# Altium PCB 100885.pcbdoc (part 3 of 3)
Units mm, origin at the board's own origin, x right, y up, seen from the top; angles counter-clockwise.
Board outline 292.21 x 226.73 mm, 2 copper layers (Top Layer, Bottom Layer), stack 0.091 mm thick; 33 components, 69 nets, 230 pads, 87 vias.
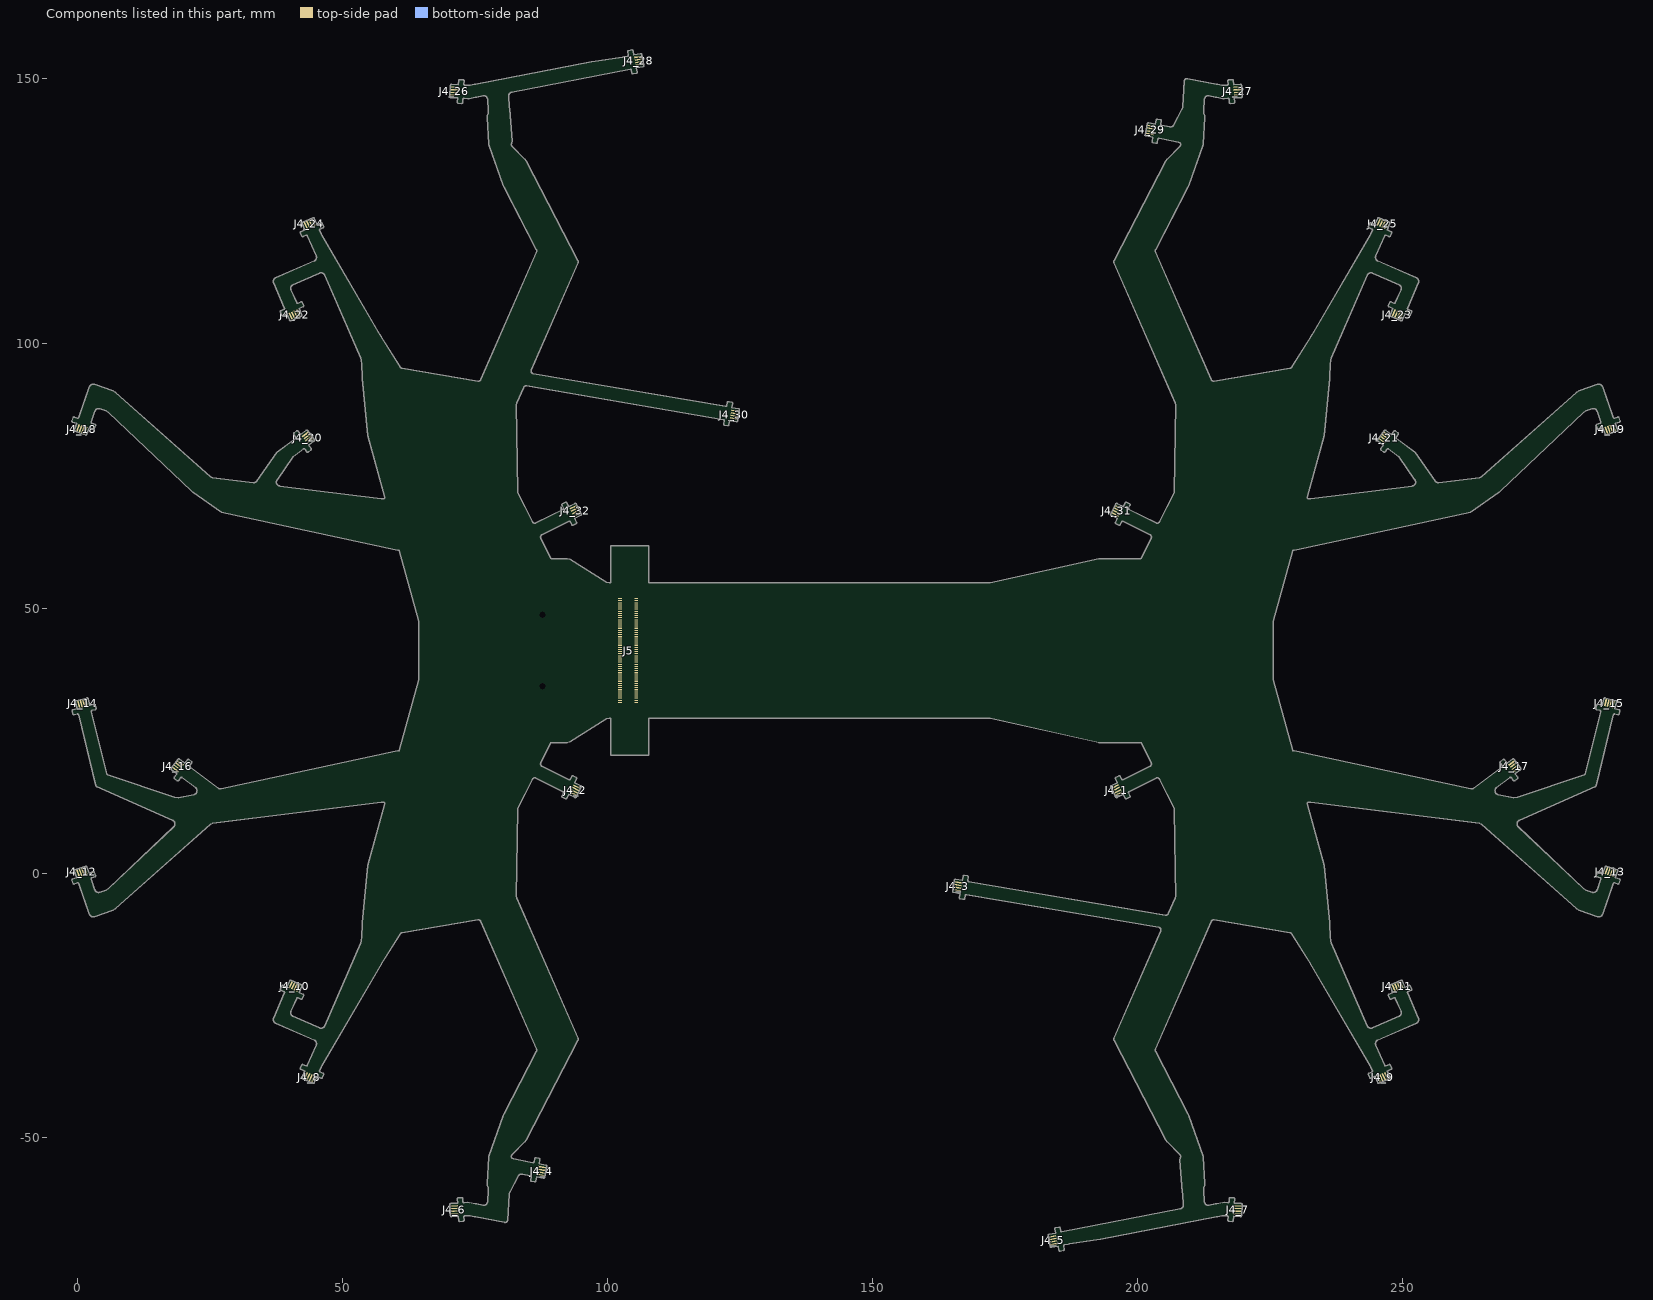
[diagram p3: the components of this part, seen from the top]

## Polygon pours and split planes (outlines as drawn) (continued)
GND on Bottom Layer "NONET_L-01_P-001" (solid, pour order 47): 70.326,-64.677 70.198,-62.581 cw(c70.398,-62.569) 70.386,-62.369 71.683,-62.29 71.634,-61.491 cw(c71.834,-61.479) 71.822,-61.279 72.421,-61.243 72.697,-65.734 72.096,-65.771 cw(c72.084,-65.571) 71.885,-65.584 71.836,-64.785 70.538,-64.864 cw(c70.526,-64.665)
GND on Bottom Layer "NONET_L-01_P-001" (solid, pour order 49): 42.25,120.257 42.007,120.805 cw(c42.19,120.885) 42.11,121.068 42.843,121.389 42.322,122.58 cw(c42.505,122.66) 42.425,122.843 44.349,123.685 cw(c44.429,123.502) 44.612,123.582 45.134,122.391 45.866,122.712 cw(c45.947,122.529) 46.13,122.609 46.37,122.059
GND on Bottom Layer "NONET_L-01_P-001" (solid, pour order 51): 38.472,105.336 ccw(c38.655,105.416) 38.735,105.233 39.468,105.554 39.989,104.363 ccw(c40.173,104.443) 40.253,104.26 42.177,105.102 ccw(c42.096,105.285) 42.28,105.365 41.758,106.556 42.491,106.877 ccw(c42.411,107.06) 42.594,107.14 42.354,107.69 38.231,105.886
GND on Bottom Layer "NONET_L-01_P-001" (solid, pour order 53): 43.498,79.478 40.801,83.077 41.279,83.438 cw(c41.399,83.278) 41.559,83.398 42.039,82.758 43.079,83.538 cw(c43.199,83.378) 43.359,83.498 44.619,81.817 cw(c44.459,81.697) 44.579,81.537 43.538,80.758 44.018,80.117 cw(c43.858,79.998) 43.978,79.837
GND on Bottom Layer "NONET_L-01_P-001" (solid, pour order 55): -0.547,83.38 cw(c-0.48,83.569) -0.669,83.635 -0.24,84.862 -0.995,85.126 cw(c-0.929,85.315) -1.118,85.381 -0.92,85.947 3.329,84.448 3.13,83.895 cw(c2.941,83.961) 2.875,83.772 2.12,84.036 1.691,82.809 cw(c1.502,82.875) 1.436,82.687
GND on Bottom Layer "NONET_L-01_P-001" (solid, pour order 57): -0.944,30.02 -1.088,30.607 cw(c-0.894,30.654) -0.941,30.849 -0.164,31.039 -0.473,32.301 cw(c-0.279,32.349) -0.326,32.543 1.714,33.042 cw(c1.761,32.848) 1.956,32.895 2.264,31.632 3.041,31.822 cw(c3.089,31.628) 3.283,31.676 3.426,31.093
GND on Bottom Layer "NONET_L-01_P-001" (solid, pour order 59): 18.258,17.822 cw(c18.378,17.983) 18.218,18.102 18.698,18.743 17.658,19.522 cw(c17.778,19.682) 17.618,19.802 18.877,21.483 cw(c19.037,21.363) 19.157,21.523 20.197,20.743 20.677,21.383 cw(c20.837,21.263) 20.957,21.423 21.437,21.063 18.732,17.463
GND on Bottom Layer "NONET_L-01_P-001" (solid, pour order 61): -0.92,-1.941 -1.118,-1.375 cw(c-0.929,-1.309) -0.995,-1.12 -0.24,-0.856 -0.669,0.371 cw(c-0.48,0.437) -0.547,0.626 1.436,1.319 cw(c1.502,1.13) 1.691,1.197 2.12,-0.031 2.875,0.234 cw(c2.941,0.045) 3.13,0.111 3.328,-0.456
GND on Bottom Layer "NONET_L-01_P-001" (solid, pour order 63): 38.233,-21.884 38.472,-21.33 cw(c38.655,-21.411) 38.735,-21.227 39.468,-21.548 39.989,-20.357 cw(c40.173,-20.437) 40.253,-20.254 42.177,-21.096 cw(c42.096,-21.279) 42.28,-21.359 41.758,-22.55 42.491,-22.871 cw(c42.411,-23.054) 42.594,-23.134 42.354,-23.684
GND on Bottom Layer "NONET_L-01_P-001" (solid, pour order 65): 42.425,-38.838 cw(c42.505,-38.654) 42.322,-38.574 42.843,-37.383 42.11,-37.062 cw(c42.19,-36.879) 42.007,-36.799 42.248,-36.249 46.372,-38.046 46.13,-38.603 cw(c45.947,-38.523) 45.866,-38.706 45.134,-38.385 44.612,-39.576 cw(c44.429,-39.496) 44.349,-39.679
no net on PSA "NONET_L-01_P-001" (solid): 64.354,45.794 64.354,38.227 91.51,24.649 91.51,59.372 64.354,45.794
no net on PSA "NONET_L-01_P-001" (solid): 24 vertices, not listed, extent 199.765,0.558 222.215,51.308

## Other copper
Top Layer:
  region net SENSOR_VCC4: 103.83,50.116 103.705,49.691 103.605,49.691 103.48,50.166 103.665,50.216
  region net SENSOR_VCC4: 103.83,48.911 103.705,48.486 103.605,48.486 103.48,48.961 103.665,49.011
  region net SENSOR_VCC4: 103.83,47.711 103.705,47.286 103.605,47.286 103.48,47.761 103.665,47.811
  region net SENSOR_VCC3: 103.83,45.311 103.705,44.886 103.65,44.875 103.48,45.361 103.665,45.411
  region net SENSOR_VCC3: 103.83,44.111 103.705,43.686 103.628,43.672 103.48,44.161 103.665,44.211
  region net SENSOR_VCC3: 103.83,42.911 103.705,42.486 103.625,42.475 103.48,42.961 103.665,43.011
  region net SENSOR_VCC2: 103.83,40.544 103.705,40.119 103.605,40.119 103.48,40.594 103.665,40.644
  region net SENSOR_VCC2: 103.83,39.325 103.705,38.9 103.625,38.9 103.48,39.375 103.665,39.425
  region net SENSOR_VCC2: 103.83,38.111 103.705,37.686 103.605,37.686 103.48,38.161 103.665,38.211
  region net SENSOR_VCC1: 103.83,35.744 103.705,35.319 103.605,35.319 103.48,35.794 103.665,35.844
  region net SENSOR_VCC1: 103.83,34.511 103.705,34.086 103.605,34.086 103.48,34.561 103.665,34.611
  region net SENSOR_VCC1: 103.83,33.325 103.705,32.9 103.605,32.9 103.48,33.375 103.665,33.425
  region net SENSOR_VCC1: 103.5,32.311 103.625,32.736 103.725,32.736 103.85,32.261 103.665,32.211
  region net SENSOR_VCC1: 103.5,33.511 103.625,33.936 103.725,33.936 103.85,33.461 103.665,33.411
  region net SENSOR_VCC1: 103.5,34.7 103.625,35.125 103.725,35.125 103.85,34.65 103.665,34.6
  region net SENSOR_VCC2: 103.5,37.111 103.625,37.536 103.725,37.536 103.85,37.061 103.665,37.011
  region net SENSOR_VCC2: 103.5,38.311 103.625,38.736 103.725,38.736 103.85,38.261 103.665,38.211
  region net SENSOR_VCC2: 103.5,39.516 103.625,39.941 103.725,39.941 103.85,39.466 103.665,39.416
  region net SENSOR_VCC3: 103.5,41.911 103.625,42.336 103.725,42.336 103.85,41.861 103.665,41.811
  region net SENSOR_VCC3: 103.5,43.111 103.625,43.536 103.725,43.536 103.85,43.061 103.665,43.011
  region net SENSOR_VCC3: 103.5,44.311 103.625,44.736 103.725,44.736 103.85,44.261 103.665,44.211
  region net SENSOR_VCC4: 103.5,46.711 103.625,47.136 103.725,47.136 103.85,46.661 103.665,46.611
  region net SENSOR_VCC4: 103.5,47.911 103.625,48.336 103.725,48.336 103.85,47.861 103.665,47.811
  region net SENSOR_VCC4: 103.5,49.111 103.625,49.536 103.725,49.536 103.85,49.061 103.665,49.011
  region net SENSOR_VCC4: 103.5,50.3 103.625,50.725 103.725,50.725 103.85,50.25 103.665,50.2
  text ".Layer_Name" at 64.059,-130.047 h3.5
Bottom Layer:
  region net SENSOR_VCC3: 103.15,45.475 103.65,45.6 103.825,45.5 103.825,45.325 103.675,45.225 103.125,45.375 103.125,45.475
  region net SENSOR_VCC2: 103.1,40.7 103.6,40.825 103.775,40.725 103.775,40.55 103.625,40.45 103.075,40.6 103.075,40.7
  region net SENSOR_VCC1: 103.125,35.9 103.625,36.025 103.8,35.925 103.8,35.75 103.65,35.65 103.1,35.8 103.1,35.9
  region net SENSOR_VCC1: 106.838,31.975 106.275,32.15 106.263,32.075 106.637,31.675 106.787,31.625 106.912,31.775 106.862,31.925
  region net SENSOR_VCC1: 106.788,33.175 106.237,33.375 106.213,33.275 106.587,32.875 106.737,32.825 106.862,32.975 106.812,33.125
  region net SENSOR_VCC1: 106.813,34.375 106.263,34.575 106.238,34.475 106.612,34.075 106.762,34.025 106.888,34.175 106.838,34.325
  region net SENSOR_VCC1: 106.863,35.6 106.313,35.8 106.288,35.7 106.662,35.3 106.812,35.25 106.938,35.4 106.888,35.55
  region net SENSOR_VCC2: 106.813,36.775 106.263,36.975 106.238,36.875 106.612,36.475 106.762,36.425 106.888,36.575 106.838,36.725
  region net SENSOR_VCC2: 106.813,37.975 106.263,38.175 106.238,38.075 106.612,37.675 106.762,37.625 106.888,37.775 106.838,37.925
  region net SENSOR_VCC2: 106.838,39.175 106.287,39.375 106.263,39.275 106.637,38.875 106.787,38.825 106.912,38.975 106.862,39.125
  region net SENSOR_VCC2: 106.863,40.4 106.313,40.6 106.288,40.5 106.662,40.1 106.812,40.05 106.938,40.2 106.888,40.35
  region net SENSOR_VCC3: 106.763,41.6 106.213,41.8 106.188,41.7 106.562,41.3 106.712,41.25 106.838,41.4 106.788,41.55
  region net SENSOR_VCC3: 106.813,42.775 106.263,42.975 106.238,42.875 106.612,42.475 106.762,42.425 106.888,42.575 106.838,42.725
  region net SENSOR_VCC3: 106.813,43.975 106.263,44.175 106.238,44.075 106.612,43.675 106.762,43.625 106.888,43.775 106.838,43.925
  region net SENSOR_VCC3: 106.788,45.175 106.237,45.375 106.213,45.275 106.587,44.875 106.737,44.825 106.862,44.975 106.812,45.125
  region net SENSOR_VCC4: 106.813,46.375 106.263,46.575 106.238,46.475 106.612,46.075 106.762,46.025 106.888,46.175 106.838,46.325
  region net SENSOR_VCC4: 106.813,47.55 106.263,47.75 106.238,47.65 106.612,47.25 106.762,47.2 106.888,47.35 106.838,47.5
  region net SENSOR_VCC4: 106.763,48.775 106.213,48.975 106.188,48.875 106.562,48.475 106.712,48.425 106.838,48.575 106.788,48.725
  region net SENSOR_VCC4: 106.725,49.95 106.175,50.15 106.15,50.05 106.525,49.65 106.675,49.6 106.8,49.75 106.75,49.9
  text "'.Board_Number'-R'.PCB_Revision'" at 146.661,52.06 h1.52
  text ".Layer_Name" at 59.568,-130.047 h3.5

## Silkscreen, mask and mechanical layers (free items; w line width, h text height)
Top Overlay:
  rectangle: 189.248,38.585 193.248,42.585
  lines w0.15: 0.622,29.708 2.172,30.076 ; 0.669,86.14 2.186,85.609 ; 0.705,-2.106 2.193,-1.585 ; 0.751,29.164 2.301,29.532 ; 0.854,86.668 2.371,86.137 ; 0.89,-2.634 2.377,-2.113 ; 3.932,16.859 5.207,18.266 ; 5.753,-3.672 6.57,-6.006 ; 5.764,87.644 6.645,90.246 ; 19.675,13.463 24.539,9.816 ; 20.172,18.216 21.114,19.473 ; 20.619,17.88 21.562,19.138 ; 22.242,72.422 24.584,74.246 ; 39.081,-23.616 40.491,-24.233 ; 39.082,107.638 40.503,108.26 ; 39.306,-23.104 40.715,-23.721 ; 39.306,107.125 40.727,107.747 ; 40.646,81.2 41.656,79.886 ; 41.082,81.535 42.092,80.221 ; 42.275,113.991 42.922,112.607 ; 42.285,-30.056 42.928,-28.543 ; 43.901,-36.202 45.295,-36.812 ; 43.946,120.221 45.347,120.844 ; 44.125,-35.69 45.519,-36.299 ; 44.165,119.728 45.566,120.35 ; 53.923,-13.632 56.713,-16.943 ; 54.047,93.466 82.46,88.688 ; 54.106,97.803 56.593,100.81 ; 54.735,-9.329 81.83,-4.721 ; 57.741,14.208 59.83,21.952 ; 57.744,69.85 59.961,61.682 ; 64.879,36.18 88.292,24.586 ; 65.146,47.838 88.529,59.518 ; 73.17,-62.733 73.264,-64.226 ; 73.2,146.656 73.286,148.315 ; 73.775,-62.695 73.87,-64.187 ; 73.783,146.626 73.869,148.284 ; 74.994,148.414 75.106,146.881 ; 75.006,-64.428 75.081,-62.859 ; 77.743,142.242 81.497,138.478 ; 77.864,-58.137 81.559,-54.319 ; 78.055,-59.781 80.859,-60.274 ; 78.098,143.772 81.035,144.341 ; 80.843,130.172 84.079,134.066 ; 80.873,-46.178 83.988,-49.856 ; 84.643,-56.498 84.945,-54.946 ; 85.192,-56.605 85.494,-55.052 ; 90.996,67.853 91.711,66.422 ; 91.006,16.182 91.716,17.609 ; 91.496,68.103 92.211,66.672 ; 91.499,15.937 92.209,17.364 ; 92.637,25.909 92.65,58.028 ; 100.056,29.948 100.056,54.041 ; 102.99,153.637 103.3,152.044 ; 103.539,153.744 103.849,152.151 ; 108.255,29.948 108.255,54.041 ; 114.488,29.948 114.488,54.041 ; 121.054,86.186 121.325,87.776 ; 121.605,86.092 121.876,87.682 ; 168.085,-3.657 168.356,-2.066 ; 168.636,-3.751 168.907,-2.16 ; 186.113,-68.137 186.418,-69.707 ; 186.662,-68.031 186.967,-69.6 ; 197.748,66.692 198.469,68.114 ; 197.769,17.309 198.433,15.981 ; 198.247,66.439 198.968,67.862 ; 198.269,17.559 198.933,16.231 ; 201.361,59.619 214.33,53.1 ; 201.704,24.574 225.106,36.357 ; 202.973,20.276 203.964,18.334 ; 204.474,139.093 204.779,140.646 ; 205.016,138.986 205.32,140.54 ; 205.76,-50.177 209.225,-45.985 ; 205.892,134.009 209.054,130.149 ; 207.572,-4.645 235.692,-9.396 ; 208.212,88.74 235.167,93.23 ; 208.357,138.332 212.134,142.152 ; 208.485,-54.327 212.135,-57.977 ; 209.052,144.345 211.989,143.739 ; 209.132,-60.272 211.93,-59.76 ; 214.87,146.885 214.934,148.442 ; 214.895,-62.894 214.969,-64.403 ; 216.094,148.234 216.175,146.716 ; 216.102,-64.11 216.191,-62.652 ; 216.66,-64.144 216.749,-62.687 ; 216.666,148.221 216.768,146.752 ; 219.4,50.55 220.925,49.775 ; 224.265,48.141 225.245,47.675 ; 229.986,61.438 232.298,70.208 ; 230.03,22.19 232.244,14.224 ; 233.118,-17.17 236.13,-13.499 ; 233.234,100.916 236.007,97.591 ; 244.373,120.35 245.836,119.71 ; 244.384,-36.291 245.917,-35.647 ; 244.598,120.863 246.06,120.223 ; 244.603,-36.811 246.136,-36.166 ; 247.012,112.513 247.695,114.069 ; 247.015,-28.515 247.69,-29.915 ; 247.848,80.184 248.851,81.549 ; 248.323,79.835 249.326,81.199 ; 249.202,107.761 250.688,107.111 ; 249.25,-23.706 250.628,-23.107 ; 249.426,108.273 250.912,107.623 ; 249.465,-24.199 250.842,-23.6 ; 265.49,9.784 270.659,13.622 ; 265.5,74.2 267.625,72.525 ; 268.405,19.13 269.344,17.89 ; 268.851,19.468 269.79,18.228 ; 283.25,90.327 284.233,87.667 ; 283.321,-6.311 284.23,-3.624 ; 284.786,18.273 285.951,16.998 ; 287.53,-2.084 288.984,-2.586 ; 287.561,86.127 289.159,86.686 ; 287.685,29.536 289.143,29.184 ; 287.705,-1.577 289.159,-2.079 ; 287.742,85.608 289.341,86.166 ; 287.814,30.069 289.272,29.718
  lines w0.254: 176,47.003 176,53 193,53 193,47 176.003,47 176,47.003
  text "#27" at 100.8,151.95 h0.8 r11
  text "#26" at 212.125,147.5 h0.8
  text "#25" at 75.575,147.35 h0.8 r12
  text "#28" at 205.5,139.3 h0.8 r349
  text "#23" at 44.675,119.475 h0.8 r294
  text "#24" at 244.45,117.625 h0.8 r66
  text "#21" at 38.525,109.875 h0.8 r293.5
  text "#22" at 250.675,108.025 h0.8 r66
  text "#18" at 287.225,88.55 h0.8 r289
  text "#29" at 118.675,87.125 h0.8 r350
  text "#17" at 2.125,86.625 h0.8 r70
  text "#20" at 248.925,80 h0.8 r323
  text "#19" at 39.425,78.825 h0.8 r37
  text "#30" at 198.825,66.625 h0.8 r333
  text "#31" at 89.575,65.825 h0.8 r26.5
  text "'.Board_Name'" at 158.755,43.922 h1.52
  text "600-'.Board_Number'" at 172.804,41.034 h1.52
  text "REV" at 183.086,38.503 h1.52
  text "#13" at 1.2,28.975 h0.8 r284
  text "#14" at 288.2,27.025 h0.8 r76
  text "#15" at 21.1,18.05 h0.8 r323
  text "#1" at 89.95,17.2 h0.8 r333
  text "#16" at 267.275,16.775 h0.8 r37
  text "#0" at 199.1,16.7 h0.8 r27
  text "#11" at 1.4,-2.85 h0.8 r289
  text "#2" at 169.125,-3.4 h0.8 r350
  text "#12" at 287.8,-4.675 h0.8 r70
  text "#10" at 249.925,-24.325 h0.8 r294
  text "#9" at 39.45,-25.65 h0.8 r66
  text "#8" at 244.025,-34.55 h0.8 r298.5
  text "#7" at 45.325,-35.825 h0.8 r66
  text "#3" at 83,-55.8 h0.8 r349
  text "#5" at 75.35,-64.1 h0.8 r350
  text "#6" at 213.225,-64.45 h0.8 r10
  text "#4" at 187.25,-69.075 h0.8 r11
  text ".Layer_Name" at 63.218,-129.964 h0.8
Bottom Overlay:
  lines w0.15: 0.629,29.715 2.179,30.083 ; 0.676,86.146 2.193,85.615 ; 0.712,-2.099 2.2,-1.579 ; 0.758,29.171 2.308,29.538 ; 0.861,86.674 2.378,86.143 ; 0.897,-2.627 2.384,-2.107 ; 3.939,16.865 5.214,18.272 ; 5.76,-3.666 6.577,-6 ; 5.771,87.65 6.652,90.252 ; 19.682,13.47 24.546,9.823 ; 20.178,18.222 21.121,19.48 ; 20.626,17.887 21.568,19.144 ; 22.249,72.428 24.591,74.252 ; 39.088,-23.61 40.498,-24.227 ; 39.089,107.644 40.51,108.266 ; 39.312,-23.097 40.722,-23.714 ; 39.313,107.132 40.734,107.754 ; 40.653,81.207 41.663,79.893 ; 41.089,81.541 42.099,80.227 ; 42.282,113.998 42.929,112.614 ; 42.292,-30.049 42.935,-28.537 ; 43.908,-36.195 45.302,-36.805 ; 43.953,120.228 45.354,120.85 ; 44.132,-35.683 45.526,-36.293 ; 44.172,119.735 45.573,120.357 ; 53.93,-13.626 56.72,-16.936 ; 54.054,93.473 82.325,88.725 ; 54.112,97.809 56.6,100.816 ; 54.742,-9.322 81.837,-4.714 ; 57.748,14.214 59.837,21.959 ; 57.751,69.857 59.968,61.688 ; 64.886,36.187 88.299,24.593 ; 65.153,47.845 88.536,59.525 ; 65.653,46.545 89.036,58.225 ; 65.761,37.412 89.175,25.75 ; 73.176,-62.727 73.271,-64.219 ; 73.207,146.663 73.293,148.321 ; 73.782,-62.688 73.877,-64.181 ; 73.79,146.632 73.876,148.291 ; 75.001,148.42 75.113,146.887 ; 75.013,-64.421 75.088,-62.852 ; 77.75,142.248 81.504,138.485 ; 77.871,-58.13 81.566,-54.313 ; 78.062,-59.775 80.865,-60.267 ; 78.105,143.779 81.042,144.348 ; 80.85,130.179 84.086,134.073 ; 80.88,-46.172 83.995,-49.85 ; 84.65,-56.492 84.952,-54.939 ; 85.199,-56.598 85.501,-55.046 ; 91.003,67.859 91.718,66.428 ; 91.013,16.189 91.723,17.616 ; 91.503,68.109 92.218,66.679 ; 91.506,15.943 92.216,17.37 ; 91.594,25.916 91.607,58.034 ; 92.644,25.916 92.657,58.034 ; 100.063,29.955 100.063,54.048 ; 102.997,153.644 103.306,152.05 ; 103.546,153.75 103.855,152.157 ; 108.262,29.955 108.262,54.048 ; 114.495,29.955 114.495,54.048 ; 121.06,86.192 121.332,87.782 ; 121.612,86.098 121.883,87.688 ; 168.092,-3.65 168.363,-2.059 ; 168.643,-3.744 168.914,-2.153 ; 186.12,-68.131 186.425,-69.7 ; 186.669,-68.024 186.974,-69.593 ; 197.755,66.699 198.476,68.121 ; 197.776,17.316 198.44,15.988 ; 198.254,66.446 198.975,67.868 ; 198.276,17.566 198.94,16.238 ; 199.675,25.375 199.675,44.1 ; 201.368,59.626 214.337,53.106 ; 201.711,24.58 225.113,36.363 ; 202.98,20.282 203.971,18.341 ; 204.481,139.099 204.786,140.652 ; 205.023,138.993 205.327,140.546 ; 205.767,-50.17 209.232,-45.978 ; 205.899,134.015 209.061,130.155 ; 206.75,51.35 214.4,51.35 ; 207.579,-4.638 235.699,-9.39 ; 207.625,0.575 215.125,0.575 ; 208.219,88.747 235.174,93.236 ; 208.364,138.339 212.141,142.159 ; 208.492,-54.321 212.142,-57.97 ; 209.059,144.352 211.996,143.745 ; 209.139,-60.265 211.937,-59.753 ; 214.876,146.891 214.941,148.448 ; 214.902,-62.887 214.976,-64.397 ; 216.101,148.24 216.182,146.722 ; 216.109,-64.103 216.198,-62.646 ; 216.667,-64.137 216.756,-62.68 ; 216.673,148.227 216.775,146.758 ; 219.407,50.557 220.932,49.782 ; 221.85,43.95 222.195,7.78 ; 224.272,48.147 225.252,47.681 ; 229.993,61.445 232.305,70.215 ; 230.037,22.197 232.251,14.231 ; 233.125,-17.164 236.137,-13.493 ; 233.241,100.923 236.014,97.598 ; 244.38,120.357 245.843,119.717 ; 244.391,-36.284 245.924,-35.64 ; 244.604,120.869 246.067,120.229 ; 244.609,-36.804 246.143,-36.16 ; 247.019,112.52 247.702,114.075 ; 247.022,-28.509 247.697,-29.909 ; 247.855,80.191 248.858,81.555 ; 248.33,79.841 249.333,81.206 ; 249.209,107.767 250.695,107.117 ; 249.257,-23.699 250.635,-23.1 ; 249.433,108.28 250.919,107.629 ; 249.472,-24.193 250.849,-23.594 ; 265.497,9.791 270.666,13.629 ; 265.507,74.207 267.632,72.532 ; 268.412,19.137 269.351,17.897 ; 268.858,19.475 269.797,18.234 ; 283.257,90.334 284.24,87.673 ; 283.328,-6.304 284.237,-3.617 ; 284.793,18.28 285.958,17.005 ; 287.537,-2.077 288.991,-2.58 ; 287.568,86.133 289.125,86.65 ; 287.692,29.542 289.15,29.191 ; 287.712,-1.57 289.166,-2.073 ; 287.749,85.614 289.3,86.15 ; 287.821,30.076 289.279,29.724
  text ".Layer_Name" at 58.293,-129.889 h3.5
Top Paste:
  text ".Layer_Name" at 63.343,-130.664 h3.5
Bottom Paste:
  text ".Layer_Name" at 59.418,-130.63 h3.5
Top Solder:
  text ".Layer_Name" at 63.234,-130.047 h3.5
Bottom Solder:
  text ".Layer_Name" at 59.793,-130.164 h3.5
Drill Guide:
  text ".Layer_Name" at 85.693,-85.214 h3.81
Outline:
  drawing of 1049 lines, arcs and shapes, not listed
FAB_DWG:
  drawing of 3124 lines, arcs and shapes, not listed
  text "1" at 427.318,319.571 h7.62
  text "6" at -124.014,319.393 h7.62
  text "5" at -13.422,319.317 h7.62
  text "7" at -233.945,319.266 h7.62
  text "4" at 96.179,319.165 h7.62
  text "3" at 206.948,319.165 h7.62
  text "2" at 316.981,319.165 h7.62
  text "REVISIONS" at 381.338,310.583 h2.54
  text "REV" at 299.046,303.583 h2.03
  text "DESCRIPTION" at 353.55,303.583 h2.03
  text "DATE" at 445.234,303.583 h2.03
  text "APRVD" at 470.422,303.583 h2.03
  text "1. MATERIAL: POLYIMIDE WITH ROLLED ANNEALED COPPER, 1/2 OZ.," at -268.773,297.272 h2.54
  text "01" at 299.45,295.583 h2.54
  text "INITIAL RELEASE" at 310.482,295.583 h2.54
  text "08/08/2016" at 439.322,295.583 h2.54
  text "PER IPC-4101, UNLESS OTHERWISE SPECIFIED ON STACK UP DETAIL." at -261.773,293.272 h2.54
  text "02" at 299.608,288.674 h2.54
  text "09/09/2016" at 439.48,288.674 h2.54
  text "OUTLINE CHANGE" at 310.668,288.607 h2.54
  text "COPPER GRAIN DIRECTION SHOULD BE ORIENTED VERTICALLY." at -263.922,286.043 h2.54
  text "2  CONFIGURATION: 2 LAYER FLEX. THROUGH PADS TO BE PLATED WITH" at -268.773,272.986 h2.54
  text "0.012mm MIN. WALL THICKNESS. SOFT IMMERSION GOLD PANEL PLATING" at -261.773,268.986 h2.54
  text "IN ACCORDANCE WITH ANSI/IPC-6013. ENIG:" at -261.773,264.986 h2.54
  text "Au: 0.05-0.1um MIN.; Ni:2-5um." at -168.773,264.986 h2.54
  text "3  COVERLAY BOTH SIDES (NO MASK)." at -268.773,257.986 h2.54
  text "4  WHITE SILKSCREEN." at -268.773,250.986 h2.54
  text "D" at 489.167,249.899 h7.62
  text "D" at -295.515,249.747 h7.62
  text "5  CONDUCTOR PATTERN TO BE ETCHED PER ARTWORK MASTER. FRONT TO BACK" at -268.773,243.986 h2.54
  text "REGISTRATION TO BE WITHIN +/- 0.1mm." at -261.773,239.986 h2.54
  text "6  HOLE DIMENSIONS ARE AFTER PLATING, 0.15 HOLES MAY BE FILLED/PLUGGED." at -268.773,231.986 h2.54
  text "7  PLATED THRU HOLES PER IPC-6013 CLASS 2." at -268.773,223.986 h2.54
  text "8  FLEX DIMENSIONS ARE IN MM.  DRILL CHART DIMENSIONS ARE IN MM." at -270.773,215.986 h2.54
  text "9  PRODUCE THE FPC ARTWORK USING ODB++ FILES PROVIDED." at -270.773,207.986 h2.54
  text "10  BUILD AND INSPECT TO IPC-A-600 CLASS 2 AND IPC-6013 CLASS 2." at -270.773,199.986 h2.54
  text "COPPER GRAIN DIRECTION" at 107.51,192.202 h5.08
  text "11  ANY ALTERATIONS TO THE ARTWORK FILES OR MATERIALS MUST BE SUBMITTED" at -270.773,191.986 h2.54
  text "FOR SYNAPSE AND/OR CUSTOMER REVIEW AND APPROVAL." at -261.773,187.986 h2.54
  text "VERTICAL" at 130.695,180.73 h5.08
  text "12  ALL 90 DEGREE EDGES ON BOARD OUTLINE TO BE 0.2MM RADII." at -270.773,179.986 h2.54
  text "13  STACKUP WITH NO STIFFENER AND NO PSA." at -271.039,172.428 h2.54
  text "16" at 366.398,171.825 h2.54
  text "14  STACKUP SHOWING BACK STIFFENER UNDER J5." at -270.81,166.144 h2.54
  text "15  STACKUP SHOWING BACK STIFFENER UNDER FPC ENDS (32X) AND WITH COVERLAY" at -271.039,160.203 h2.54
  text "REMOVED ON THE TOP." at -263.435,154.95 h2.54
  text "16  STACKUP SHOWING 2 REGIONS WITH PSA APPLIED." at -271.063,149.08 h2.54
  text "13" at -207.752,128.996 h2.54
  text "PRIMARY SIDE" at -201.013,128.531 h2.54
  text "C" at 489.167,124.448 h7.62
  text "C" at -295.642,124.245 h7.62
  text "KAPTON COVERLAY  0.0125MM" at -170.31,113.807 h2.54
  text "ADHESIVE" at -225.238,107.252 h2.54
  text "0.015MM" at -170.379,107.067 h2.54
  text "1/2 OZ RA CU" at -233.835,102.117 h2.54
  text "LAYER 1 (SIGNAL)  0.018MM" at -170.45,101.617 h2.54
  text "0.11176 +/- 10%" at -272.958,99.122 h2.54
  text "POLYIMIDE" at -226.45,97.563 h2.54
  text "0.025MM" at -170.756,97.515 h2.54
  text "SECONDARY SIDE PSA" at 334.827,95.34 h5.08
  text "LAYER 2 (GND)  0.018MM" at -170.266,93.218 h2.54
  text "1/2 OZ RA CU" at -233.9,92.968 h2.54
  text "ADHESIVE" at -225.272,88.218 h2.54
  text "0.015MM" at -170.882,87.838 h2.54
  text "KAPTON COVERLAY  0.0125MM" at -170.266,80.968 h2.54
  text "15" at 387.814,67.114 h2.54
  text "SECONDARY SIDE" at -203.673,65.263 h2.54
  text "x 32" at 388.931,62.763 h2.54
  text "LAYER DETAIL - STANDARD STACKUP" at -250.523,53.015 h5.08
  text "SCALE:NONE" at -204.343,45.572 h2.03
  text "RECOMMENDED STACK-UP" at -209.994,40.359 h2.03
  text "STACK-UP TO BE FINALIZED BY VENDOR" at -221.362,35.206 h2.03
  text "FOR BEST BUILD VARIATIONS" at -213.829,29.709 h2.03
  text "PRIMARY SIDE" at -203.495,0.718 h2.54
  text "B" at -295.413,-1.155 h7.62
  text "B" at 489.294,-1.155 h7.62
  text "14" at -222.3,-3.818 h2.54
  text "REGION 2, STACKUP AT J5" at -215.85,-4.125 h2.54
  text "14" at 388.44,-12.719 h2.54
  text "KAPTON COVERLAY  0.0125MM" at -172.792,-14.006 h2.54
  text "ADHESIVE" at -227.719,-20.561 h2.54
  text "0.015MM" at -172.861,-20.746 h2.54
  text "1/2 OZ RA CU" at -236.316,-25.696 h2.54
  text "LAYER 1 (SIGNAL)  0.018MM" at -172.932,-26.196 h2.54
  text "POLYIMIDE" at -228.932,-30.25 h2.54
  text "0.025MM" at -173.238,-30.298 h2.54
  text "0.61176 +/- 10%" at -276.936,-31.895 h2.54
  text "LAYER 2 (GND)  0.018MM" at -172.748,-34.595 h2.54
  text "1/2 OZ RA CU" at -236.382,-34.845 h2.54
  text "ADHESIVE" at -227.754,-39.595 h2.54
  text "0.015MM" at -173.364,-39.975 h2.54
  text "KAPTON COVERLAY  0.0125MM" at -172.748,-46.845 h2.54
  text "FR4 STIFFENER   0.450MM" at -168.7,-51.875 h2.54
  text "SECONDARY SIDE" at -206.154,-62.55 h2.54
  text "SECONDARY SIDE STIFFENERS" at 327.417,-80.153 h5.08
  text "PRIMARY SIDE" at -56.684,-90.223 h2.54
  text "DIMENSIONS ARE FOR REFERENCE ONLY," at 65.412,-94.047 h2.29
  text "REGION 4, STACKUP WITH PSA" at -69.039,-95.065 h2.54
  text "16" at -75.364,-95.16 h2.54
  text "USE BOARD OUTLINE FOR DIMENSIONAL DATA." at 60.822,-98.837 h2.29
  text "PRIMARY SIDE" at -194.137,-100.117 h2.54
  text "15" at -218.538,-104.868 h2.54
  text "KAPTON COVERLAY  0.0125MM" at -25.981,-104.946 h2.54
  text "REGION 3, STACKUP AT FPC ENDS (32X)" at -211.831,-105.039 h2.54
  text "ADHESIVE" at -80.908,-111.502 h2.54
  text "0.015MM" at -26.05,-111.687 h2.54
  text "1/2 OZ RA CU" at -89.505,-116.636 h2.54
  text "LAYER 1 (SIGNAL)  0.018MM" at -162.47,-117.134 h2.54
  text "LAYER 1 (SIGNAL)  0.018MM" at -26.121,-117.136 h2.54
  text "1/2 OZ RA CU" at -225.675,-117.15 h2.54
  text "POLYIMIDE" at -218.47,-121.188 h2.54
  text "POLYIMIDE" at -82.12,-121.19 h2.54
  text "0.025MM" at -162.777,-121.236 h2.54
  text "0.025MM" at -26.427,-121.239 h2.54
  text "LAYER 2 (GND)  0.018MM" at -162.286,-125.533 h2.54
  text "LAYER 2 (GND)  0.018MM" at -25.937,-125.535 h2.54
  text "1/2 OZ RA CU" at -225.92,-125.783 h2.54
  text "1/2 OZ RA CU" at -89.571,-125.785 h2.54
  text "A" at 489.04,-126.91 h7.62
  text "A" at -295.667,-127.037 h7.62
  text "0.3 +/- 10%" at -253.218,-130.369 h2.54
  text "APPROVALS" at 281.174,-130.417 h2.03
  text "DATE" at 324.234,-130.417 h2.03
  text "ADHESIVE" at -217.292,-130.533 h2.54
  text "ADHESIVE" at -80.943,-130.535 h2.54
  text "0.015MM" at -162.902,-130.914 h2.54
  text "0.015MM" at -26.553,-130.916 h2.54
  text "UNLESS OTHERWISE" at 225.226,-132.417 h2.54
  text "KAPTON COVERLAY  0.0125MM" at -162.036,-135.133 h2.54
  text "DESIGNER" at 264.482,-136.417 h2.03
  text "SPECIFIED" at 232.338,-137.417 h2.54
  text "KAPTON COVERLAY  0.0125MM" at -25.937,-137.785 h2.54
  text "0.025MM" at -162.452,-138.989 h2.54
  text "ADHESIVE" at -217.825,-139.4 h2.54
  text "DIMENSIONS ARE" at 227.258,-142.417 h2.54
  text "PRICE" at 268.482,-142.417 h2.54
  text "09/09/2016" at 318.322,-142.417 h2.54
  text "PSA, 3M TYPE 467MP, 0.05MM" at -25.747,-142.839 h2.54
  text "1511 Sixth Ave. Suite 300, Seattle, WA 98101 206.381.0898" at 355.57,-143.417 h2.54
  text "KAPTON STIFFENER  0.200MM" at -162.071,-144.064 h2.54
  text "IN MILLIMETERS" at 227.258,-147.417 h2.54
  text "ENGINEER" at 264.482,-149.417 h2.03
  text "PRINTED CIRCUIT BOARD" at 381.978,-151.917 h3.81
  text "PROPRIETARY" at 176.718,-152.417 h3.81
  text "SECONDARY SIDE" at -195.693,-153.488 h2.54
  text "SECONDARY SIDE" at -59.343,-153.49 h2.54
  text "BRUEY/  CIUFFO" at 268.482,-155.417 h2.54
  text "TOLERANCES:" at 231.306,-157.417 h2.54
  text "AND" at 188.91,-158.417 h3.81
  text ".Board_Name" at 368.433,-159.998 h5.08
  text "MECH ENG" at 264.482,-162.417 h2.03
  text ".XX" at 229.986,-164.417 h2.29
  text "0.25" at 243.482,-164.417 h2.29
  text "CONFIDENTIAL" at 175.194,-164.917 h3.81
  text "SIZE" at 347.634,-166.417 h1.78
  text "DWG NO" at 358.482,-166.417 h1.78
  text "REV" at 466.346,-166.417 h1.78
  text "DAHLGREN/ DONAGHY" at 268.482,-168.417 h2.54
  text "THE INFORMATION CONTAINED IN" at 177.208,-169.167 h1.52
  text ".XXX" at 228.154,-171.417 h2.29
  text "0.127" at 243.482,-171.417 h2.29
  text "THIS DRAWING IS PROPRIETARY AND" at 175.384,-171.917 h1.52
  text "RESTRICTED. ANY REPRODUCTION" at 177.208,-174.667 h1.52
  text "601-" at 375.537,-176.118 h7.62
  text ".Board_Number" at 403.937,-176.218 h7.62
  text "D" at 347.434,-176.417 h7.62
  text ".PCB_Revision" at 461.878,-176.925 h7.62
  text "IN PART OR WHOLE WITHOUT THE" at 177.208,-177.417 h1.52
  text "ANGLES" at 230.49,-178.417 h2.29
  text "5" at 249.482,-178.417 h2.29
  text "EXPRESS WRITTEN PERMISSION" at 178.174,-180.167 h1.52
  text "OF THE OWNER IS PROHIBITED" at 178.174,-182.917 h1.52
  text "SCALE:NONE" at 348.362,-183.417 h1.78
  text "SHEET 1 OF 1" at 459.938,-183.417 h1.78
  text "1" at 427.522,-195.465 h7.62
  text "6" at -123.938,-195.617 h7.62
  text "5" at -13.499,-195.617 h7.62
  text "4" at 95.95,-195.896 h7.62
  text "3" at 206.77,-195.922 h7.62
  text "2" at 317.209,-195.922 h7.62
  text "7" at -234.047,-196.481 h7.62
ASY_DWG:
  circle w0.38: c253.225,-175.869 r0.829
  lines w0.3: 263.482,-185.417 263.482,-125.417 ; 263.482,-171.417 343.482,-171.417 ; 263.482,-158.417 343.482,-158.417 ; 263.482,-145.417 343.482,-145.417 484.481,-145.417 ; 263.482,-132.417 343.482,-132.417 ; 294.482,286.583 484.481,286.583 ; 294.807,293.675 294.482,293.583 484.481,293.583 ; 294.807,308.675 294.482,308.583 484.481,308.583 ; 308.482,279.583 308.482,308.583 ; 313.482,-185.417 313.482,-125.417 ; 343.482,-185.417 343.482,-125.417 ; 343.482,-179.417 484.481,-179.417 ; 343.482,-163.417 483.481,-163.417 ; 356.481,-179.417 356.481,-163.417 ; 433.481,279.583 433.481,308.583 ; 452.482,-179.417 452.482,-163.417 ; 464.482,279.583 464.482,308.583
  lines w0.38: 238.482,-171.417 240.482,-171.417 ; 238.482,-169.417 240.482,-169.417 ; 238.482,-164.417 240.482,-164.417 ; 238.482,-162.417 240.482,-162.417 ; 239.482,-170.417 239.482,-168.417 ; 239.482,-163.417 239.482,-161.417 ; 244.482,-178.417 246.482,-178.417 ; 244.482,-176.417 246.482,-176.417 ; 245.482,-177.417 245.482,-175.417
  lines w0.508: 264.504,315.787 264.504,328.741 ; 264.504,315.787 264.504,328.741 ; 264.504,315.787 264.504,328.741 ; -306.107,-60.768 -286.803,-60.768 -306.107,-60.768 ; -306.107,-60.311 -286.803,-60.311 -306.107,-60.311 ; -306.107,64.631 -286.803,64.631 -306.107,64.631 ; -306.107,65.089 -286.803,65.089 -306.107,65.089 ; -306.107,190.031 -286.803,190.031 -306.107,190.031 ; -306.107,190.488 -286.803,190.488 -306.107,190.488 ; -176.871,-198.868 -176.871,-185.914 -176.871,-198.868 ; -176.871,315.787 -176.871,328.741 -176.871,315.787 ; -176.414,-198.868 -176.414,-185.914 -176.414,-198.868 ; -176.414,315.787 -176.414,328.741 -176.414,315.787 ; -66.661,-198.868 -66.661,-185.914 -66.661,-198.868 ; -66.661,315.787 -66.661,328.741 -66.661,315.787 ; -66.204,-198.868 -66.204,-185.914 -66.204,-198.868 ; -66.204,315.787 -66.204,328.741 -66.204,315.787 ; 43.575,-198.868 43.575,-185.914 43.575,-198.868 ; 43.575,315.787 43.575,328.741 43.575,315.787 ; 44.032,-198.868 44.032,-185.914 44.032,-198.868 ; 44.032,315.787 44.032,328.741 44.032,315.787 ; 153.837,315.787 153.837,328.741 153.837,315.787 ; 154.294,315.787 154.294,328.741 154.294,315.787 ; 264.047,315.787 264.047,328.741 264.047,315.787 ; 374.258,316.041 374.258,328.741 374.258,316.041 ; 374.283,-198.868 374.283,-185.914 374.283,-198.868 ; 374.715,315.787 374.715,328.741 374.715,315.787 ; 374.74,-198.868 374.74,-185.914 374.74,-198.868 ; 484.722,-60.768 504.026,-60.768 484.722,-60.768 ; 484.722,-60.311 504.026,-60.311 484.722,-60.311 ; 484.722,64.657 504.026,64.657 484.722,64.657 ; 484.722,65.114 504.026,65.114 484.722,65.114 ; 484.722,190.082 504.026,190.082 484.722,190.082 ; 484.722,190.539 504.026,190.539 484.722,190.539
  lines w1: -286.518,-185.417 -286.518,315.583 484.481,315.583 484.481,-185.417 -286.518,-185.417
  lines w1.1: 154.481,-198.417 154.481,-185.417 ; 168.482,-185.417 168.482,-145.417 219.482,-145.417 ; 219.482,-185.417 219.482,-145.417 ; 263.482,-198.417 263.482,-185.417 ; 294.482,279.583 294.482,315.583 ; 294.482,300.583 484.481,300.583 ; 343.482,-125.417 219.482,-125.417 219.482,-145.417
  text "1" at 427.318,319.571 h7.62
  text "6" at -124.014,319.393 h7.62
  text "5" at -13.422,319.317 h7.62
  text "7" at -233.945,319.266 h7.62
  text "4" at 96.179,319.165 h7.62
  text "3" at 206.948,319.165 h7.62
  text "2" at 316.981,319.165 h7.62
  text "REVISIONS" at 381.338,310.583 h2.54
  text "REV" at 299.046,303.583 h2.03
  text "DESCRIPTION" at 353.55,303.583 h2.03
  text "DATE" at 445.234,303.583 h2.03
  text "APRVD" at 470.422,303.583 h2.03
  text "NOTES: UNLESS OTHERWISE SPECIFIED" at -274.393,303.483 h2.03
  text "1   RoHS COMPLIANT ASSEMBLY REQUIRED. ASSEMBLE PER IPC-A-610, CLASS 2," at -274.293,296.983 h2.03
  text "01" at 299.45,295.583 h2.54
  text "INITIAL RELEASE" at 310.482,295.583 h2.54
  text "08/08/2016" at 439.322,295.583 h2.54
  text "2   AQUEOUS BASED CLEANING AFTER SOLDER FOR ALL COMPONENTS IS PREFERRED, NO-CLEAN" at -274.199,291.778 h2.03
  text "02" at 299.634,288.61 h2.54
  text "OUTLINE CHANGE" at 310.666,288.61 h2.54
  text "09/09/2016" at 439.506,288.61 h2.54
  text "RoHS SOLDER PROCESS IS ACCEPTABLE." at -274.343,287.633 h2.03
  text "3   ITEM IDENTIFICATION: MARK REVISION NUMBER OF THIS DRAWING IN THE SPACE PROVIDED." at -274.518,281.833 h2.03
  text "D" at 489.167,249.899 h7.62
  text "D" at -295.515,249.747 h7.62
  text "C" at 489.167,124.448 h7.62
  text "C" at -295.642,124.245 h7.62
  text "B" at -295.413,-1.155 h7.62
  text "B" at 489.294,-1.155 h7.62
  text "ASSEMBLY TOP" at 77.166,-85.392 h3.81
  text "A" at 489.04,-126.91 h7.62
  text "A" at -295.667,-127.037 h7.62
  text "APPROVALS" at 281.174,-130.417 h2.03
  text "DATE" at 324.234,-130.417 h2.03
  text "UNLESS OTHERWISE" at 225.226,-132.417 h2.54
  text "DESIGNER" at 264.482,-136.417 h2.03
  text "SPECIFIED" at 232.338,-137.417 h2.54
  text "DIMENSIONS ARE" at 227.258,-142.417 h2.54
  text "PRICE" at 268.482,-142.417 h2.54
  text "09/09/2016" at 318.322,-142.417 h2.54
  text "1511 Sixth Ave. Suite 300, Seattle, WA 98101 206.381.0898" at 355.57,-143.417 h2.54
  text "IN MILLIMETERS" at 227.258,-147.417 h2.54
  text "ENGINEER" at 264.482,-149.417 h2.03
  text "PRINTED CIRCUIT BOARD ASSEMBLY" at 368.052,-151.917 h3.81
  text "PROPRIETARY" at 176.718,-152.417 h3.81
  text "BRUEY/  CIUFFO" at 268.482,-155.417 h2.54
  text "TOLERANCES:" at 231.306,-157.417 h2.54
  text "AND" at 188.91,-158.417 h3.81
  text ".Board_Name" at 368.052,-159.998 h5.08
  text "MECH ENG" at 264.482,-162.417 h2.03
  text ".XX" at 229.986,-164.417 h2.29
  text "0.25" at 243.482,-164.417 h2.29
  text "CONFIDENTIAL" at 175.194,-164.917 h3.81
  text "SIZE" at 347.634,-166.417 h1.78
  text "DWG NO" at 358.482,-166.417 h1.78
  text "REV" at 466.346,-166.417 h1.78
  text "DAHLGREN/ DONAGHY" at 268.482,-168.417 h2.54
  text "THE INFORMATION CONTAINED IN" at 177.208,-169.167 h1.52
  text ".XXX" at 228.154,-171.417 h2.29
  text "0.127" at 243.482,-171.417 h2.29
  text "THIS DRAWING IS PROPRIETARY AND" at 175.384,-171.917 h1.52
  text "RESTRICTED. ANY REPRODUCTION" at 177.208,-174.667 h1.52
  text "600-" at 374.237,-176.118 h7.62
  text ".Board_Number" at 403.937,-176.218 h7.62
  text "D" at 347.434,-176.417 h7.62
  text ".PCB_Revision" at 461.878,-176.925 h7.62
  text "IN PART OR WHOLE WITHOUT THE" at 177.208,-177.417 h1.52
  text "ANGLES" at 230.49,-178.417 h2.29
  text "5" at 249.482,-178.417 h2.29
  text "EXPRESS WRITTEN PERMISSION" at 178.174,-180.167 h1.52
  text "OF THE OWNER IS PROHIBITED" at 178.174,-182.917 h1.52
  text "SCALE:4:1" at 349.074,-183.417 h1.78
  text "SHEET 1 OF 2" at 459.938,-183.417 h1.78
  text "1" at 427.522,-195.465 h7.62
  text "6" at -123.938,-195.617 h7.62
  text "5" at -13.499,-195.617 h7.62
  text "4" at 95.95,-195.896 h7.62
  text "3" at 206.77,-195.922 h7.62
  text "2" at 317.209,-195.922 h7.62
  text "7" at -234.047,-196.481 h7.62
ASY_DWG_R:
  lines w0.3: -286.518,-179.417 -145.519,-179.417 ; -286.518,-145.417 -145.519,-145.417 ; -285.518,-163.417 -145.519,-163.417 ; -254.519,-179.417 -254.519,-163.417 ; -158.518,-179.417 -158.518,-163.417 ; -145.519,-185.417 -145.519,-125.417
  lines w0.508: -66.541,315.787 -66.541,328.741 ; -66.541,315.787 -66.541,328.741 ; -66.541,315.787 -66.541,328.741 ; -306.063,-60.768 -286.759,-60.768 -306.063,-60.768 ; -306.063,-60.311 -286.759,-60.311 -306.063,-60.311 ; -306.063,64.657 -286.759,64.657 -306.063,64.657 ; -306.063,65.114 -286.759,65.114 -306.063,65.114 ; -306.063,190.082 -286.759,190.082 -306.063,190.082 ; -306.063,190.539 -286.759,190.539 -306.063,190.539 ; -176.777,-198.868 -176.777,-185.914 -176.777,-198.868 ; -176.752,315.787 -176.752,328.741 -176.752,315.787 ; -176.32,-198.868 -176.32,-185.914 -176.32,-198.868 ; -176.295,316.041 -176.295,328.741 -176.295,316.041 ; -66.084,315.787 -66.084,328.741 -66.084,315.787 ; 43.669,315.787 43.669,328.741 43.669,315.787 ; 44.126,315.787 44.126,328.741 44.126,315.787 ; 153.931,-198.868 153.931,-185.914 153.931,-198.868 ; 153.931,315.787 153.931,328.741 153.931,315.787 ; 154.388,-198.868 154.388,-185.914 154.388,-198.868 ; 154.388,315.787 154.388,328.741 154.388,315.787 ; 264.167,-198.868 264.167,-185.914 264.167,-198.868 ; 264.167,315.787 264.167,328.741 264.167,315.787 ; 264.624,-198.868 264.624,-185.914 264.624,-198.868 ; 264.624,315.787 264.624,328.741 264.624,315.787 ; 374.377,-198.868 374.377,-185.914 374.377,-198.868 ; 374.377,315.787 374.377,328.741 374.377,315.787 ; 374.834,-198.868 374.834,-185.914 374.834,-198.868 ; 374.834,315.787 374.834,328.741 374.834,315.787 ; 484.766,-60.768 504.07,-60.768 484.766,-60.768 ; 484.766,-60.311 504.07,-60.311 484.766,-60.311 ; 484.766,64.631 504.07,64.631 484.766,64.631 ; 484.766,65.089 504.07,65.089 484.766,65.089 ; 484.766,190.031 504.07,190.031 484.766,190.031 ; 484.766,190.488 504.07,190.488 484.766,190.488
  lines w1: -286.518,-185.417 -286.518,315.583 484.481,315.583 484.481,-185.417 -286.518,-185.417
  lines w1.1: -65.519,-198.417 -65.519,-185.417 ; 43.482,-198.417 43.482,-185.417
  text "1" at -229.355,319.571 h7.62
  text "6" at 321.977,319.393 h7.62
  text "5" at 211.385,319.317 h7.62
  text "7" at 431.908,319.266 h7.62
  text "2" at -119.018,319.165 h7.62
  text "3" at -8.985,319.165 h7.62
  text "4" at 101.784,319.165 h7.62
  text "NOTES: UNLESS OTHERWISE SPECIFIED" at 472.356,303.483 h2.03
  text "1   RoHS COMPLIANT ASSEMBLY REQUIRED. ASSEMBLE PER IPC-A-610, CLASS 2," at 472.256,296.983 h2.03
  text "2   AQUEOUS BASED CLEANING AFTER SOLDER FOR ALL COMPONENTS IS PREFERRED, NO-CLEAN" at 472.162,291.778 h2.03
  text "RoHS SOLDER PROCESS IS ACCEPTABLE." at 472.306,287.633 h2.03
  text "3   ITEM IDENTIFICATION: MARK REVISION NUMBER OF THIS DRAWING IN THE SPACE PROVIDED." at 472.481,281.833 h2.03
  text "D" at -291.204,249.899 h7.62
  text "D" at 493.478,249.747 h7.62
  text "C" at -291.204,124.448 h7.62
  text "C" at 493.605,124.245 h7.62
  text "PSA" at 46.524,39.772 h3
  text "PSA" at 191.619,0.409 h3
  text "B" at -291.331,-1.155 h7.62
  text "B" at 493.376,-1.155 h7.62
  text "ASSEMBLY BOTTOM" at 122.166,-85.392 h3.81
  text "A" at -291.077,-126.91 h7.62
  text "A" at 493.63,-127.037 h7.62
  text "1511 Sixth Ave. Suite 300, Seattle, WA 98101 206.381.0898" at -157.607,-143.417 h2.54
  text "PRINTED CIRCUIT BOARD ASSEMBLY" at -170.299,-151.917 h3.81
  text ".Board_Name" at -184.203,-160.192 h5.08
  text "REV" at -268.383,-166.417 h1.78
  text "DWG NO" at -160.519,-166.417 h1.78
  text "SIZE" at -149.671,-166.417 h1.78
  text "600-" at -176.274,-176.118 h7.62
  text ".Board_Number" at -205.974,-176.218 h7.62
  text "D" at -149.471,-176.417 h7.62
  text ".PCB_Revision" at -264.807,-176.939 h7.62
  text "SHEET 2 OF 2" at -261.975,-183.417 h1.78
  text "SCALE:4:1" at -151.111,-183.417 h1.78
  text "1" at -229.559,-195.465 h7.62
  text "5" at 211.462,-195.617 h7.62
  text "6" at 321.901,-195.617 h7.62
  text "4" at 102.013,-195.896 h7.62
  text "2" at -119.246,-195.922 h7.62
  text "3" at -8.807,-195.922 h7.62
  text "7" at 432.01,-196.481 h7.62
TITLEBLOCK:
  lines w0.25: 35.582,-123.917 156.582,-123.917 ; 94.082,-104.917 156.582,-104.917 156.582,-133.417 35.582,-133.417 35.582,-111.417 156.582,-111.417 ; 112.081,-133.417 112.081,-104.917 ; 112.081,-116.417 156.582,-116.417 ; 145.581,-123.917 145.581,-116.417
  text "PRODUCT" at 98.326,-107.417 h1.52
  text "1511 SIXTH AVENUE, THIRD FLOOR" at 113.082,-107.417 h1.52
  text "DEVELOPMENT" at 96.394,-110.417 h1.52
  text "SEATTLE,WA 98101  206.381.0898" at 113.082,-110.417 h1.52
  text "DATE" at 113.082,-113.417 h1.02
  text "09/09/2016" at 125.962,-114.917 h2.03
  text "PRINTED CIRCUIT BOARD" at 54.346,-115.917 h2.29
  text "PART NUMBER" at 113.082,-118.417 h1.02
  text "REV" at 149.858,-118.417 h1.02
  text ".Board_Name" at 39.34,-121.784 h3.81
  text "601-" at 118.737,-122.118 h2.54
  text ".Board_Number" at 129.037,-122.118 h2.54
  text ".PCB_Revision" at 148.882,-122.585 h2.54
  text "PROPRIETARY AND CONFIDENTIAL" at 117.308,-126.917 h1.52
  text "THE INFORMATION CONTAINED IN THIS DRAWING IS PROPRIETARY AND" at 116.091,-128.917 h0.76
  text "RESTRICTED. ANY REPRODUCTION IN PART OR WHOLE WITHOUT THE" at 117.003,-130.417 h0.76
  text "EXPRESS WRITTEN PERMISSION OF THE OWNER IS PROHIBITED" at 117.719,-131.917 h0.76
DXF_TOP:
  drawing of 1076 lines, arcs and shapes, not listed
Stiffener:
  drawing of 544 lines, arcs and shapes, not listed
  text ".Layer_Name" at 66.156,-130.671 h3.5
Lines:
  drawing of 1203 lines, arcs and shapes, not listed
PSA:
  text ".Layer_Name" at 71.014,-130.587 h3.5
FAB_LOCATIONS:
  lines w0.008: 263.057,203.018 263.057,203.668
Drill Drawing:
  lines w0.254: 234.506,-101.828 236.199,-101.828 236.199,-100.135 234.506,-100.135 234.506,-101.828 ; 234.506,-96.325 236.199,-96.325 235.353,-98.018 234.506,-96.325
  lines w0.381: 232.987,-102.971 439.534,-102.971 ; 232.987,-95.351 439.534,-95.351 ; 246.979,-106.781 246.979,-91.541 ; 260.692,-106.781 260.692,-91.541 ; 288.37,-106.781 288.37,-91.541 ; 301.219,-106.781 301.219,-91.541 ; 319.858,-106.781 319.858,-91.541 ; 357.946,-106.781 357.946,-91.541 ; 372.928,-106.781 372.928,-91.541 ; 391.872,-106.781 391.872,-91.541 ; 410.916,-106.781 410.916,-91.541 ; 232.987,-106.781 439.534,-106.781 439.534,-91.541 232.987,-91.541 232.987,-106.781
  text ".Layer_Name" at 82.693,-85.089 h3.81
  text "Symbol" at 235.273,-94.208 h1.83
  text "Count" at 248.122,-94.208 h1.83
  text "Hole Size" at 261.835,-94.208 h1.83
  text "Plated" at 289.513,-94.208 h1.83
  text "Hole Type" at 302.362,-94.208 h1.83
  text "Drill Layer Pair" at 321.001,-94.208 h1.83
  text "Via/Pad" at 359.089,-94.208 h1.83
  text "Pad Shape" at 374.071,-94.208 h1.83
  text "Template" at 393.015,-94.208 h1.83
  text "Hole Tolerance" at 412.059,-94.208 h1.83
  text "87" at 248.122,-98.018 h1.52
  text "0.230mm (9.06mil)" at 261.835,-98.018 h1.52
  text "PTH" at 289.513,-98.018 h1.52
  text "Round" at 302.362,-98.018 h1.52
  text "Top Layer - Bottom Layer" at 321.001,-98.018 h1.52
  text "Via" at 359.089,-98.018 h1.52
  text "Rounded" at 374.071,-98.018 h1.52
  text "v40h23m0mx0" at 393.015,-98.018 h1.52
  text "2" at 248.122,-101.828 h1.52
  text "1.200mm (47.24mil)" at 261.835,-101.828 h1.52
  text "NPTH" at 289.513,-101.828 h1.52
  text "Round" at 302.362,-101.828 h1.52
  text "Top Layer - Bottom Layer" at 321.001,-101.828 h1.52
  text "Pad" at 359.089,-101.828 h1.52
  text "Rounded" at 374.071,-101.828 h1.52
  text "c100hn120" at 393.015,-101.828 h1.52
  text "89 Total" at 248.122,-105.638 h1.52
DXF_SEP09:
  drawing of 1049 lines, arcs and shapes, not listed

## Dimensions
398.297,68.527 to 392.217,68.527 on FAB_DWG
400.723,-5.028 to 400.723,-11.108 on FAB_DWG
207.248,12.204 to 196.391,2.272 on ASY_DWG_R
64.737,41.709 to 48.411,41.709 on ASY_DWG_R
336.711,178.751 to 361.003,173.353 on FAB_DWG
397.956,180.124 to 379.418,173.495 on FAB_DWG

## Text inside footprints (layer, text, board x,y; h text height)
J5: Top Overlay "99" at 106.448,52.742 h0.6 r90; Top Overlay "100" at 101.927,52.627 h0.6 r90; Top Overlay "2" at 101.838,31.032 h0.6 r90; Top Overlay "1" at 106.455,31.15 h0.6 r90; 3D_TOP "1" at 106.528,32.359 h1.02 r270; 3D_TOP "2" at 100.194,32.386 h1.02 r270; 3D_TOP "100" at 100.14,52.952 h1.02 r270; 3D_TOP "99" at 106.509,52.644 h1.02 r270